# EAGLE board pcb (EAGLE 8.1.0)
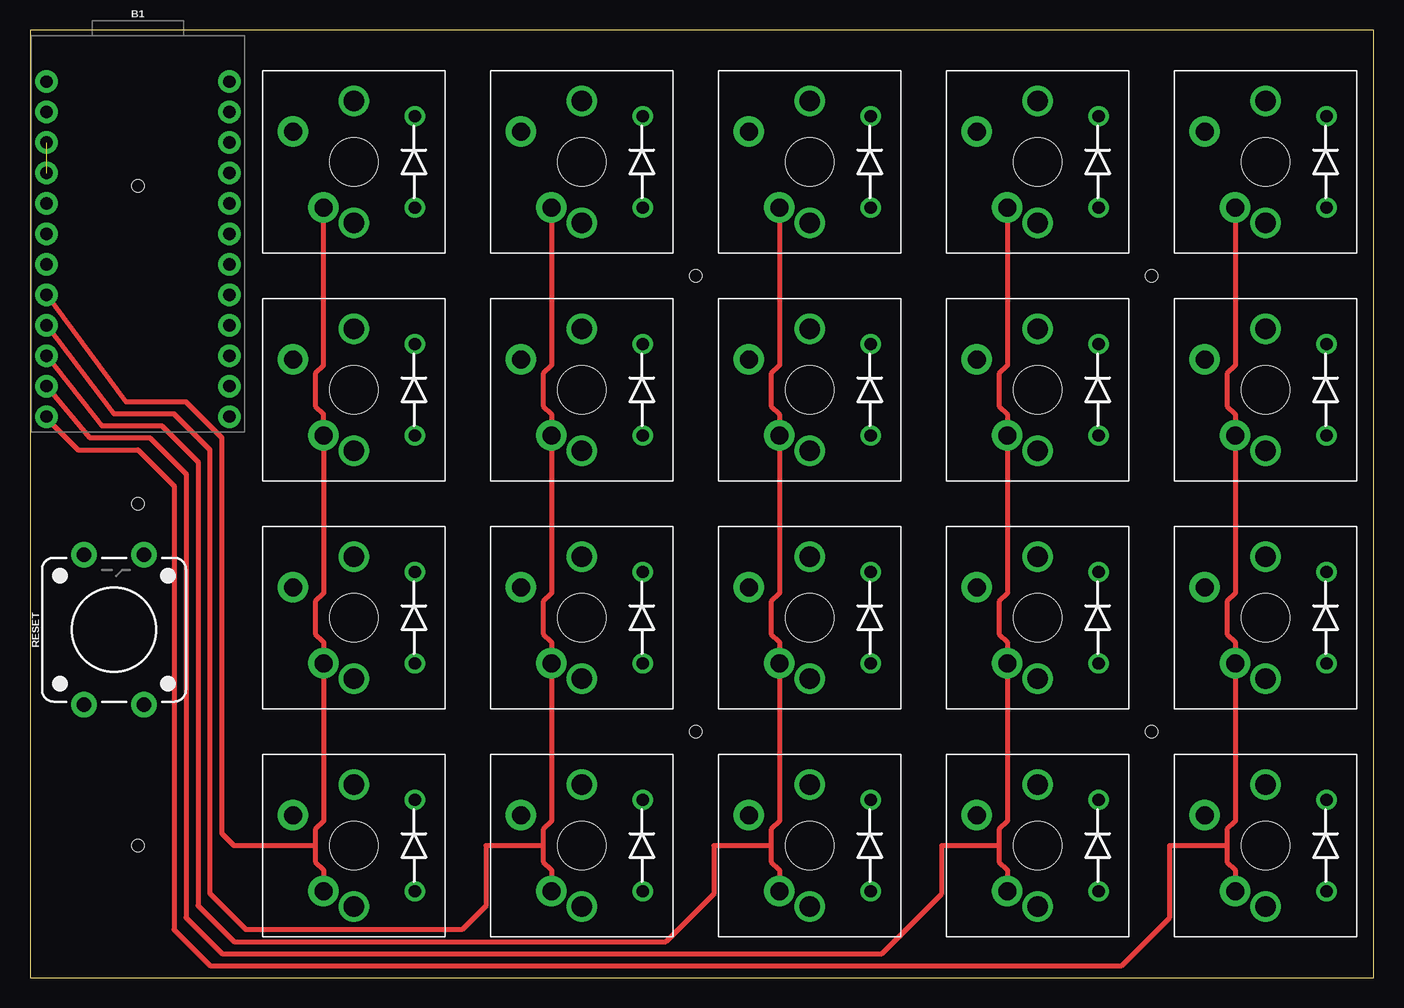
[diagram p0: board, top side]
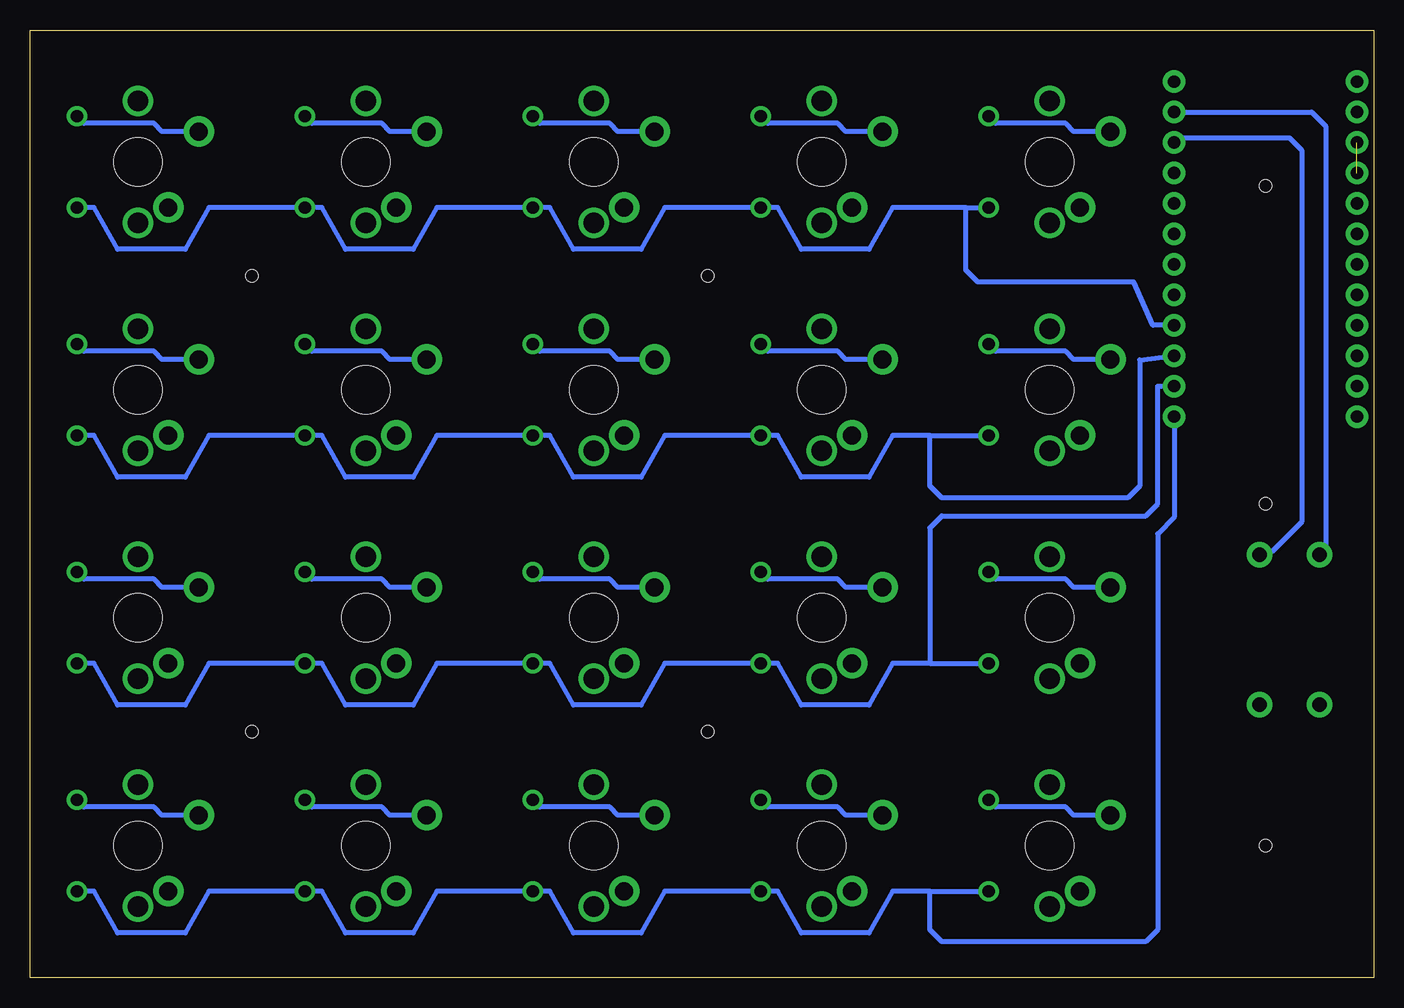
[diagram p1: board, bottom side, seen from below]

Size 112 x 79 mm. Coordinates in mm from the lower left corner, seen from the top.
Outline: 0,0 112,0 112,79 0,79 0,0
Copper layers (1*16): Top 0.035mm / dielectric 1.5mm / Bottom 0.035mm
Design rules "dirt_cheap_dirty_boards.v1 *": minimum track width 5mil, minimum drill 12mil, track to track 5mil, track to pad 5mil, pad to pad 5mil, via to via 5mil, smd to smd 0mil, copper to edge 10mil, drill to drill 10mil, minimum pad ring 10mil, minimum via ring 6mil, stop-mask expansion 2mil, vias tented up to drill 25mil, thermal gap 10mil
Holes 1 mm at 9,66 9,39.5 9,11 55.5,20.5 55.5,58.5 93.5,58.5 93.5,20.5

## Footprints (pad centres in the part's own frame; a part is rotated, then mirrored left to right if it is on the bottom)
SPARKFUN_PRO_MICRO = drill 1.016 pad 1.88: 1 -7.62,12.7; 2 -7.62,10.16; 3 -7.62,7.62; 4 -7.62,5.08; 5 -7.62,2.54; 6 -7.62,0; 7 -7.62,-2.54; 8 -7.62,-5.08; 9 -7.62,-7.62; 10 -7.62,-10.16; 11 -7.62,-12.7; 12 -7.62,-15.24; 13 7.62,-15.24; 14 7.62,-12.7; 15 7.62,-10.16; 16 7.62,-7.62; 17 7.62,-5.08; 18 7.62,-2.54; 19 7.62,0; 20 7.62,2.54; 21 7.62,5.08; 22 7.62,7.62; 23 7.62,10.16; 24 7.62,12.7
TACTILE_SWITCH_PTH_12MM = drill 1.2 pad 2.159: 1 6.25,-2.5; 2 -6.25,-2.5; 3 6.25,2.5; 4 -6.25,2.5
CHERRY-MX-DIODE = drill 1.016 pad 1.676: D1 -3.81,-5.08; D2 3.81,-5.08 | drill 1.714 pad 1.93: P$3 -5.08,0; P$4 5.08,0 | drill 1.5 pad 2.54: SW1 -3.81,2.54; SW2 2.54,5.08 | hole 4: 0,0

## Placement (x,y rotation side)
B1  Pro Micro  [SPARKFUN_PRO_MICRO]  9,62 0 top
RESET  RESET  [TACTILE_SWITCH_PTH_12MM]  7,29 90 top
U$1  CHERRY-MX-DIODE  [CHERRY-MX-DIODE]  27,68 90 top
U$2  CHERRY-MX-DIODE  [CHERRY-MX-DIODE]  46,68 90 top
U$3  CHERRY-MX-DIODE  [CHERRY-MX-DIODE]  65,68 90 top
U$4  CHERRY-MX-DIODE  [CHERRY-MX-DIODE]  84,68 90 top
U$5  CHERRY-MX-DIODE  [CHERRY-MX-DIODE]  103,68 90 top
U$6  CHERRY-MX-DIODE  [CHERRY-MX-DIODE]  27,49 90 top
U$7  CHERRY-MX-DIODE  [CHERRY-MX-DIODE]  46,49 90 top
U$8  CHERRY-MX-DIODE  [CHERRY-MX-DIODE]  65,49 90 top
U$9  CHERRY-MX-DIODE  [CHERRY-MX-DIODE]  84,49 90 top
U$10  CHERRY-MX-DIODE  [CHERRY-MX-DIODE]  103,49 90 top
U$11  CHERRY-MX-DIODE  [CHERRY-MX-DIODE]  27,30 90 top
U$12  CHERRY-MX-DIODE  [CHERRY-MX-DIODE]  46,30 90 top
U$13  CHERRY-MX-DIODE  [CHERRY-MX-DIODE]  65,30 90 top
U$14  CHERRY-MX-DIODE  [CHERRY-MX-DIODE]  84,30 90 top
U$15  CHERRY-MX-DIODE  [CHERRY-MX-DIODE]  103,30 90 top
U$16  CHERRY-MX-DIODE  [CHERRY-MX-DIODE]  27,11 90 top
U$17  CHERRY-MX-DIODE  [CHERRY-MX-DIODE]  46,11 90 top
U$18  CHERRY-MX-DIODE  [CHERRY-MX-DIODE]  65,11 90 top
U$19  CHERRY-MX-DIODE  [CHERRY-MX-DIODE]  84,11 90 top
U$20  CHERRY-MX-DIODE  [CHERRY-MX-DIODE]  103,11 90 top

## Library data of the parts
B1 = SparkFun-Boards
RESET = SparkFun-Switches; PROD_ID: SWCH-09185; SF_SKU: COM-09190
U$1-U$20 = cherrymx

## Nets
GND: B1.3 B1.4
N$1: B1.8
N$2: B1.9 U$2.SW1 U$7.SW1 U$12.SW1 U$17.SW1
N$3: B1.23 RESET.3
N$4: B1.11
N$5: B1.12
N$6: U$2.D2 U$2.SW2
N$7: U$7.D2 U$7.SW2
N$8: U$12.D2 U$12.SW2
N$9: U$17.D2 U$17.SW2
N$10: U$1.D2 U$1.SW2
N$11: U$6.D2 U$6.SW2
N$12: U$11.D2 U$11.SW2
N$13: U$16.D2 U$16.SW2
N$14: U$3.D2 U$3.SW2
N$15: U$8.D2 U$8.SW2
N$16: U$13.D2 U$13.SW2
N$17: U$18.D2 U$18.SW2
N$18: U$4.D2 U$4.SW2
N$19: U$9.D2 U$9.SW2
N$20: U$14.D2 U$14.SW2
N$21: U$19.D2 U$19.SW2
N$22: U$5.D2 U$5.SW2
N$23: U$10.D2 U$10.SW2
N$24: U$15.D2 U$15.SW2
N$25: U$20.D2 U$20.SW2
N$26: B1.22 RESET.1
N$29: B1.10 U$3.SW1 U$8.SW1 U$13.SW1 U$18.SW1
N$30: B1.13 U$16.D1 U$17.D1 U$18.D1 U$19.D1 U$20.D1
N$31: B1.15 U$6.D1 U$7.D1 U$8.D1 U$9.D1 U$10.D1
N$32: B1.14 U$11.D1 U$12.D1 U$13.D1 U$14.D1 U$15.D1
N$36: B1.16 U$1.D1 U$2.D1 U$3.D1 U$4.D1 U$5.D1
RAW: B1.24
S$1: U$4.SW1 U$9.SW1 U$14.SW1 U$19.SW1
S$2: U$5.SW1 U$10.SW1 U$15.SW1 U$20.SW1
S$3: U$1.SW1 U$6.SW1 U$11.SW1 U$16.SW1
VCC: B1.21

## Tracks (layer width: path | path; a pad name or v marks a point on that pad's centre or on a via)
GND  (1 unrouted)
N$1
  Top 0.406: 23.78,11 17,11 16,12 16,45 13,48 8,48 B1.8
N$2
  Top 0.406: U$2.SW1 43.46,51.01 42.78,50.33 42.78,47.67 43.46,46.99 U$7.SW1 43.46,32.01 42.78,31.33 42.78,28.67 43.46,27.99 U$12.SW1 43.46,13.01 42.78,12.33 42.78,11 | 42.78,11 42.78,9.67 43.46,8.99 U$17.SW1 | 42.78,11 38,11 38,6 36,4 18,4 15,7 15,44 12,47 7,47 B1.9
N$3
  Bottom 0.406: B1.23 5.16,72.16 4,71 4,35.75 RESET.3
N$4
  Top 0.406: 80.78,11 76,11 76,7 71,2 16,2 13,5 13,42 10,45 5,45 B1.11
N$5
  Top 0.406: 99.78,11 95,11 95,5 91,1 15,1 12,4 12,41 9,44 4,44 1.38,46.62 B1.12
N$6
  Bottom 0.406: U$2.SW2 43.99,70.54 44.67,71.22 50.49,71.22 U$2.D2
N$7
  Bottom 0.406: U$7.SW2 43.99,51.54 44.67,52.22 50.49,52.22 U$7.D2
N$8
  Bottom 0.406: U$12.SW2 43.99,32.54 44.67,33.22 50.49,33.22 U$12.D2
N$9
  Bottom 0.406: U$17.SW2 43.99,13.54 44.67,14.22 50.49,14.22 U$17.D2
N$10
  Bottom 0.406: U$1.SW2 24.99,70.54 25.67,71.22 31.49,71.22 U$1.D2
N$11
  Bottom 0.406: U$6.SW2 24.99,51.54 25.67,52.22 31.49,52.22 U$6.D2
N$12
  Bottom 0.406: U$11.SW2 24.99,32.54 25.67,33.22 31.49,33.22 U$11.D2
N$13
  Bottom 0.406: U$16.SW2 24.99,13.54 25.67,14.22 31.49,14.22 U$16.D2
N$14
  Bottom 0.406: U$3.SW2 62.99,70.54 63.67,71.22 69.49,71.22 U$3.D2
N$15
  Bottom 0.406: U$8.SW2 62.99,51.54 63.67,52.22 69.49,52.22 U$8.D2
N$16
  Bottom 0.406: U$13.SW2 62.99,32.54 63.67,33.22 69.49,33.22 U$13.D2
N$17
  Bottom 0.406: U$18.SW2 62.99,13.54 63.67,14.22 69.49,14.22 U$18.D2
N$18
  Bottom 0.406: U$4.SW2 81.99,70.54 82.67,71.22 88.49,71.22 U$4.D2
N$19
  Bottom 0.406: U$9.SW2 81.99,51.54 82.67,52.22 88.49,52.22 U$9.D2
N$20
  Bottom 0.406: U$14.SW2 81.99,32.54 82.67,33.22 88.49,33.22 U$14.D2
N$21
  Bottom 0.406: U$19.SW2 81.99,13.54 82.67,14.22 88.49,14.22 U$19.D2
N$22
  Bottom 0.406: U$5.SW2 100.99,70.54 101.67,71.22 107.49,71.22 U$5.D2
N$23
  Bottom 0.406: U$10.SW2 100.99,51.54 101.67,52.22 107.49,52.22 U$10.D2
N$24
  Bottom 0.406: U$15.SW2 100.99,32.54 101.67,33.22 107.49,33.22 U$15.D2
N$25
  Bottom 0.406: U$20.SW2 100.99,13.54 101.67,14.22 107.49,14.22 U$20.D2
N$26
  Bottom 0.406: B1.22 16.24,70 7,70 6,69 6,38 8.5,35.5 RESET.1
N$29
  Top 0.406: U$3.SW1 62.46,51.01 61.78,50.33 61.78,47.67 62.46,46.99 U$8.SW1 62.46,32.01 61.78,31.33 61.78,28.67 62.46,27.99 U$13.SW1 62.46,13.01 61.78,12.33 61.78,11 | 61.78,11 61.78,9.67 62.46,8.99 U$18.SW1 | 61.78,11 57,11 57,7 53,3 17,3 14,6 14,43 11,46 6,46 B1.10
N$30
  Bottom 0.406: 37,7.19 U$16.D1 32,7.11 | 37,7.19 40.09,7.19 42.05,3.73 47.7,3.73 49.66,7.19 U$17.D1 59.09,7.19 61.05,3.73 66.7,3.73 68.66,7.19 U$18.D1 78.09,7.19 80.05,3.73 85.7,3.73 87.66,7.19 U$19.D1 97.09,7.19 99.05,3.73 104.7,3.73 106.66,7.19 U$20.D1 | B1.13 16.62,38.38 18,37 18,4 19,3 36,3 37,4 37,7.19
N$31
  Bottom 0.406: 37,45.19 40.09,45.19 42.05,41.73 47.7,41.73 49.66,45.19 U$7.D1 59.09,45.19 61.05,41.73 66.7,41.73 68.66,45.19 U$8.D1 78.09,45.19 80.05,41.73 85.7,41.73 87.66,45.19 U$9.D1 97.09,45.19 99.05,41.73 104.7,41.73 106.66,45.19 U$10.D1 | 37,45.19 U$6.D1 | B1.15 19.5,51.5 19.5,41 20.5,40 36,40 37,41 37,45.19
N$32
  Bottom 0.406: 37,26.19 U$11.D1 | 37,26.19 40.09,26.19 42.05,22.73 47.7,22.73 49.66,26.19 U$12.D1 59.09,26.19 61.05,22.73 66.7,22.73 68.66,26.19 U$13.D1 78.09,26.19 80.05,22.73 85.7,22.73 87.66,26.19 U$14.D1 97.09,26.19 99.05,22.73 104.7,22.73 106.66,26.19 U$15.D1 | B1.14 18,49.3 18,39.5 19,38.5 36,38.5 37,37.5 37,26.19
N$36
  Bottom 0.406: 34,64.19 40.09,64.19 42.05,60.73 47.7,60.73 49.66,64.19 U$2.D1 59.09,64.19 61.05,60.73 66.7,60.73 68.66,64.19 U$3.D1 78.09,64.19 80.05,60.73 85.7,60.73 87.66,64.19 U$4.D1 97.09,64.19 99.05,60.73 104.7,60.73 106.66,64.19 U$5.D1 | 34,64.19 U$1.D1 | B1.16 18.38,54.38 20,58 33,58 34,59 34,64.19
S$1
  Top 0.406: U$4.SW1 81.46,51.01 80.78,50.33 80.78,47.67 81.46,46.99 U$9.SW1 81.46,32.01 80.78,31.33 80.78,28.67 81.46,27.99 U$14.SW1 81.46,13.01 80.78,12.33 80.78,9.67 81.46,8.99 U$19.SW1
S$2
  Top 0.406: U$5.SW1 100.46,51.01 99.78,50.33 99.78,47.67 100.46,46.99 U$10.SW1 100.46,32.01 99.78,31.33 99.78,28.67 100.46,27.99 U$15.SW1 100.46,13.01 99.78,12.33 99.78,9.67 100.46,8.99 U$20.SW1
S$3
  Top 0.406: U$1.SW1 24.46,51.01 23.78,50.33 23.78,47.67 24.46,46.99 U$6.SW1 24.46,32.01 23.78,31.33 23.78,28.67 24.46,27.99 U$11.SW1 24.46,13.01 23.78,12.33 23.78,9.67 24.46,8.99 U$16.SW1